# Altium PCB TAUV-Thruster_Board.PcbDoc
Units mil, origin at the board's own origin, x right, y up, seen from the top; angles counter-clockwise.
Board outline 3914.83 x 2417.52 mil, 2 copper layers (Top Layer, Bottom Layer); 41 components, 19 nets, 146 pads, 38 vias.
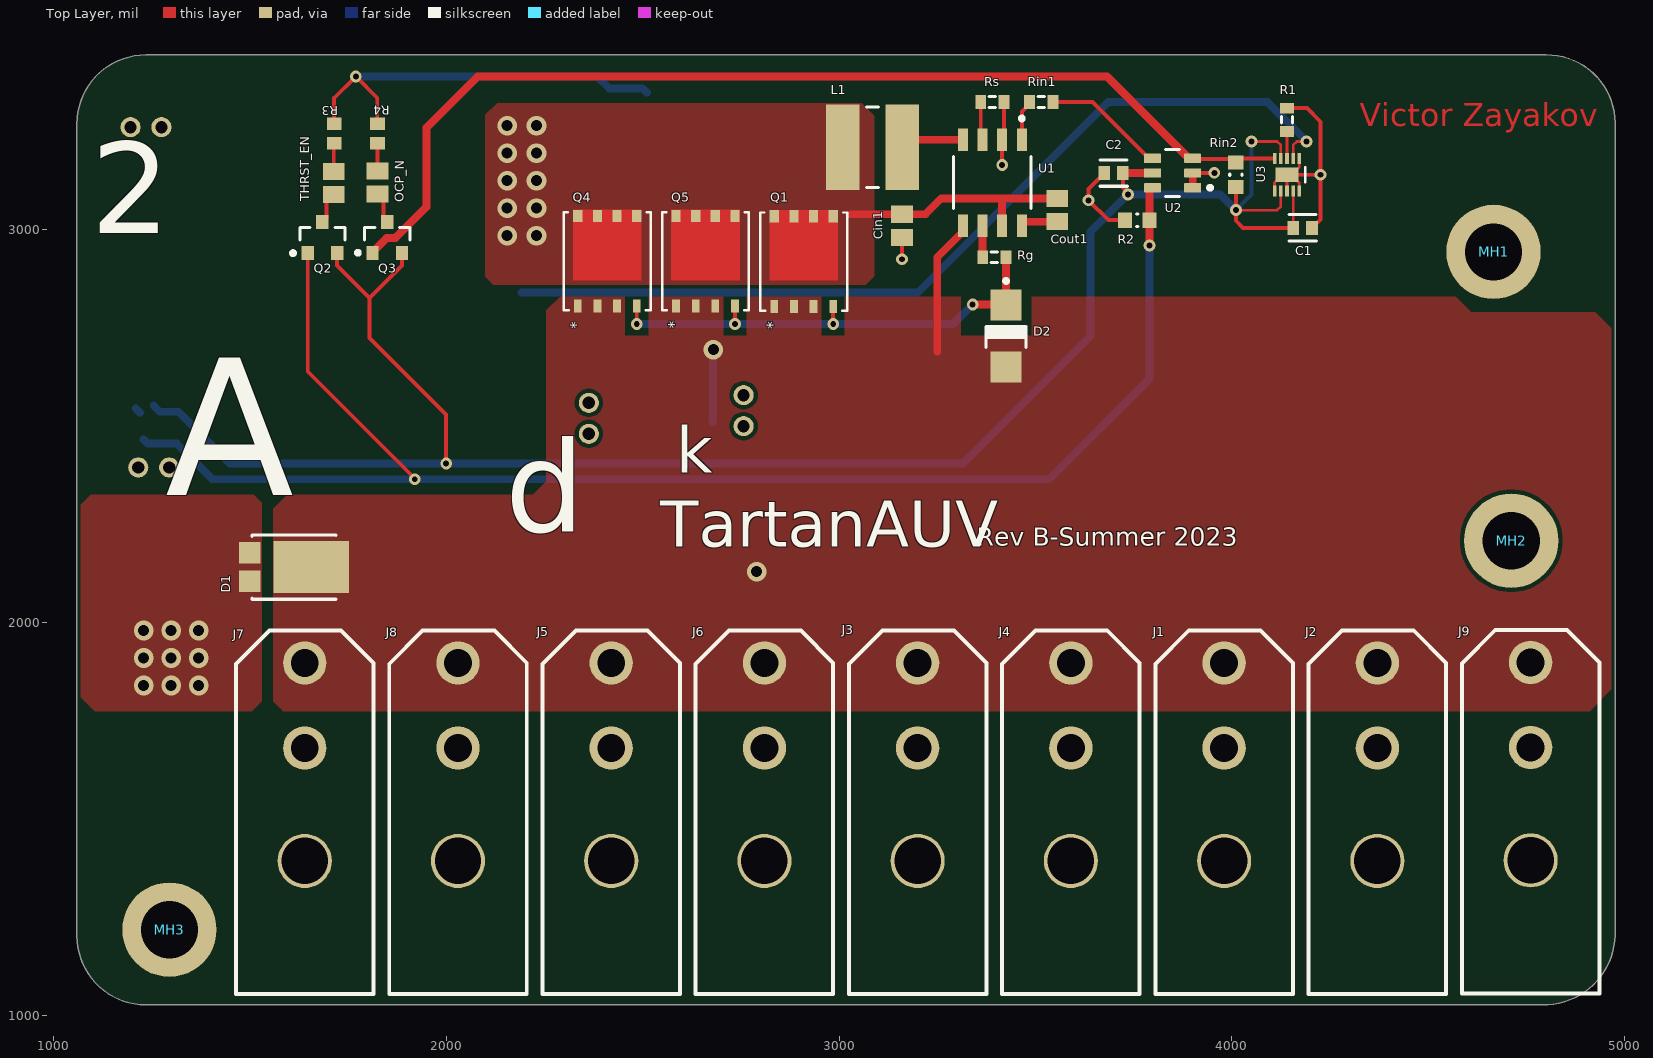
[diagram p0: Top Layer view]
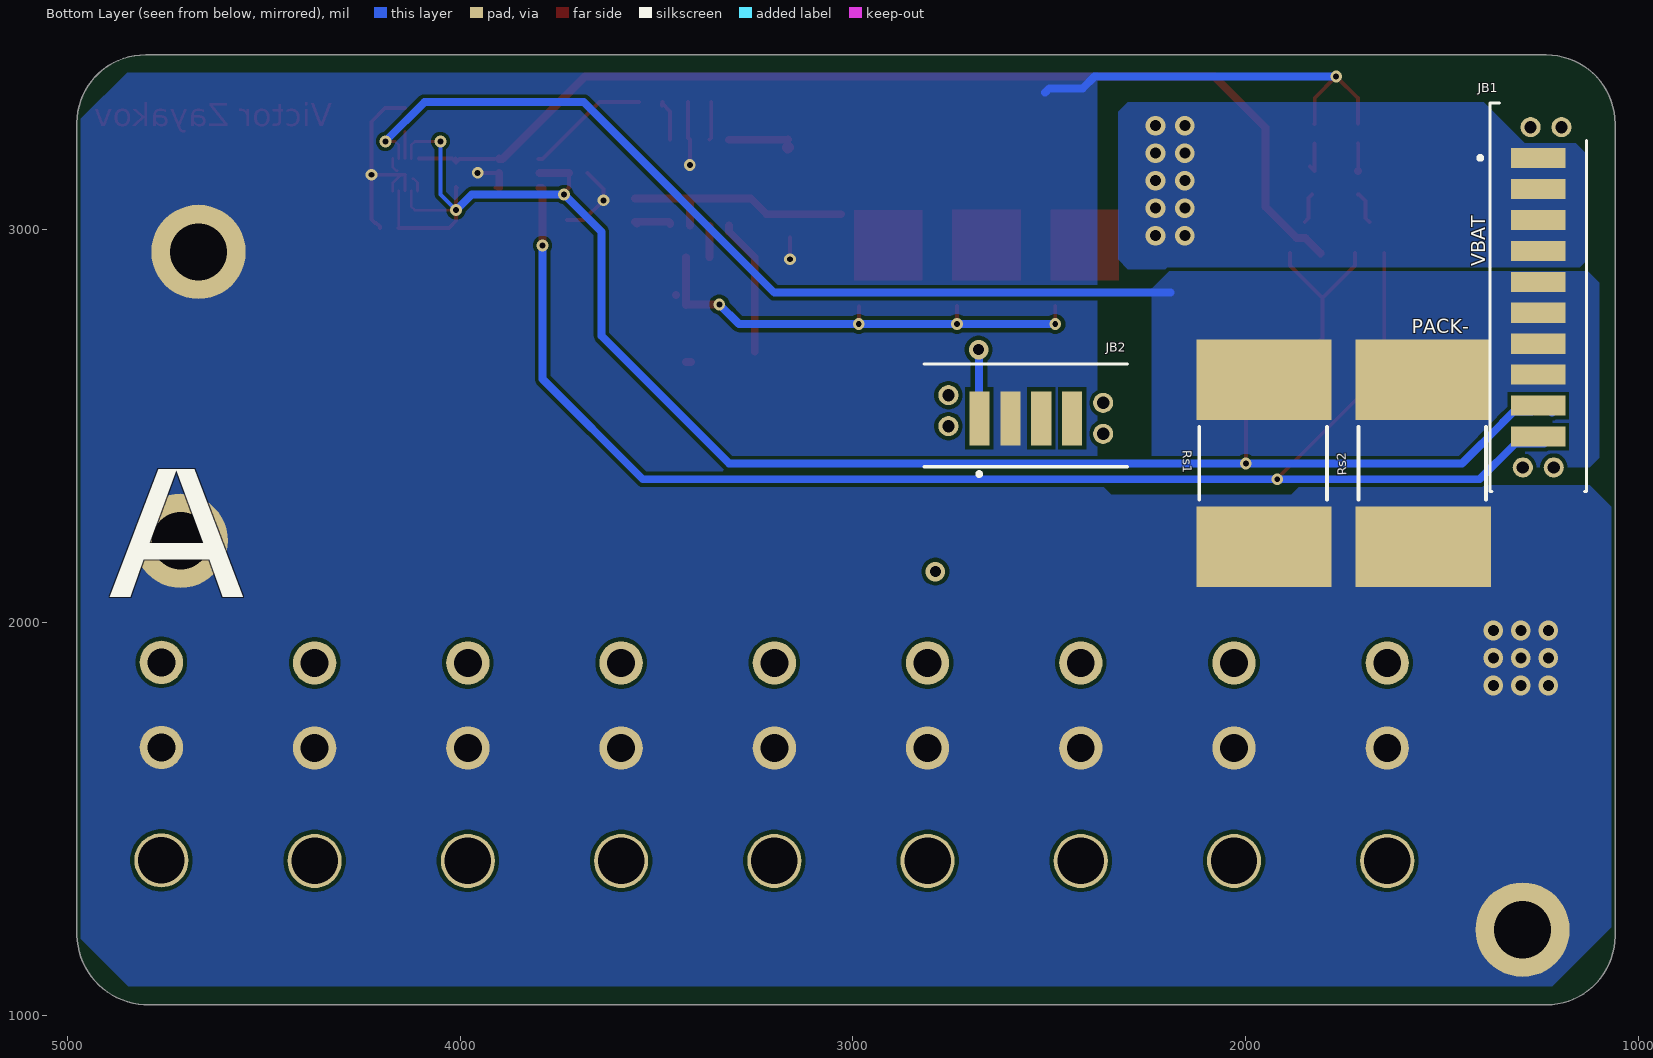
[diagram p1: Bottom Layer view, seen from below]
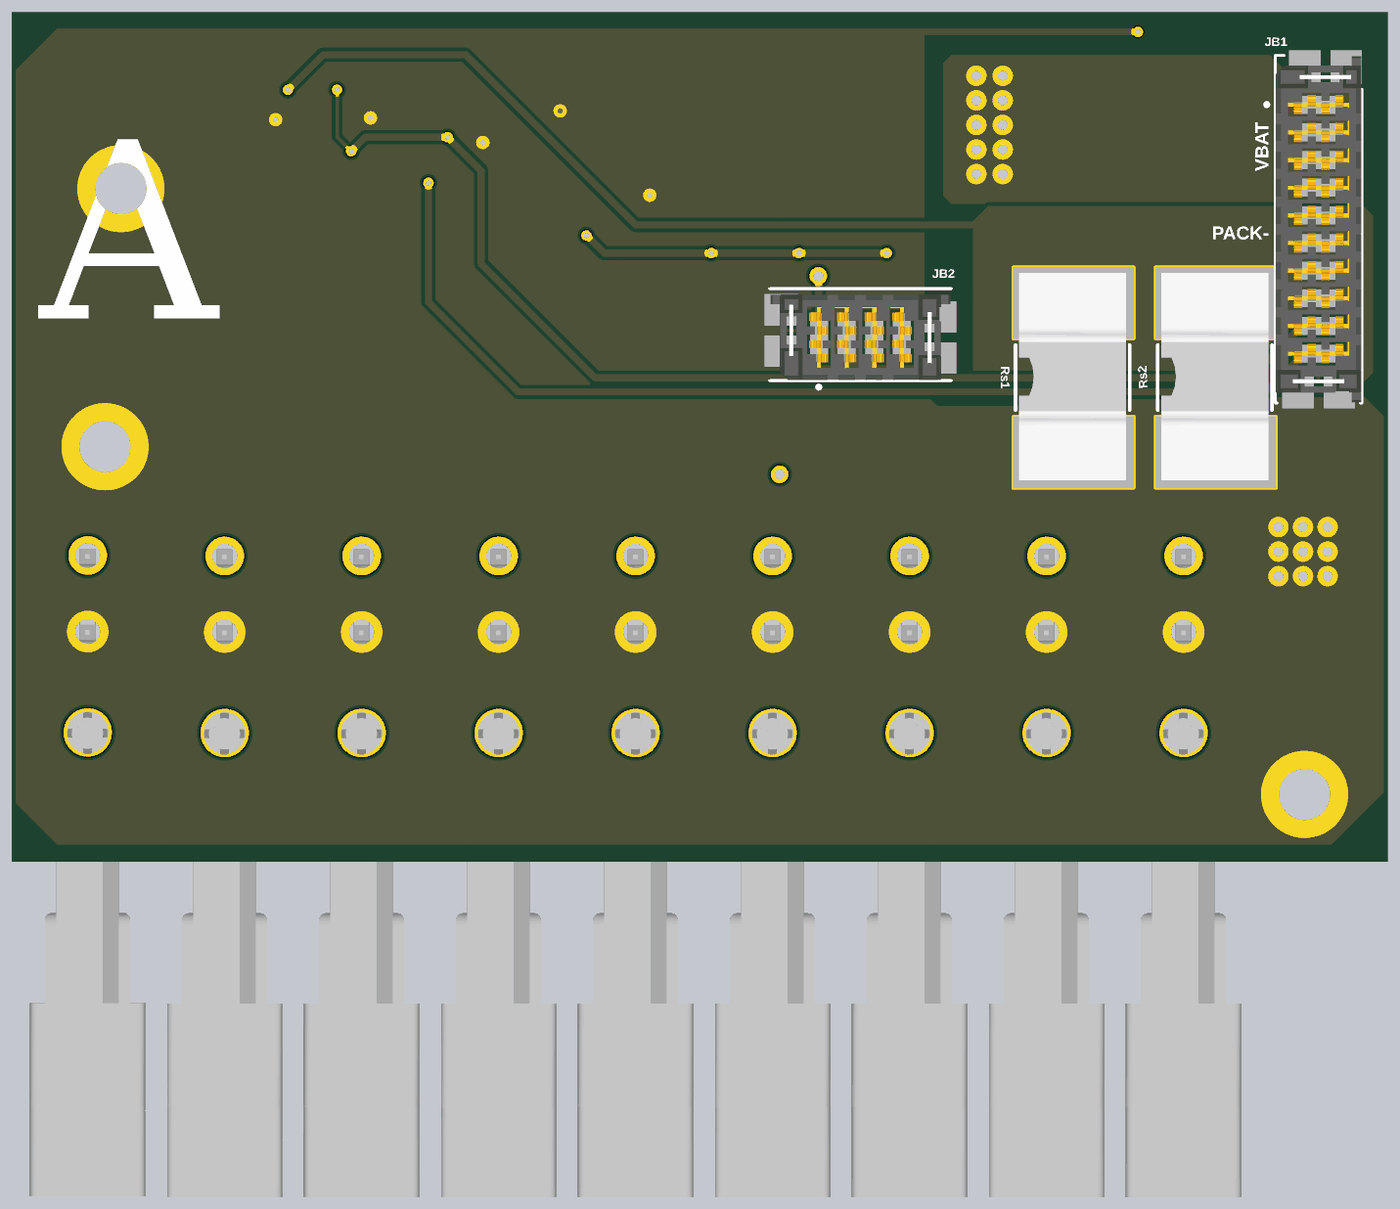
[diagram p2: 3D render of the assembled board from below, using the file's embedded part models]

## Layer stack, top to bottom
Top Solder: solder mask 0.4, Solder Resist, Dk 3.5
Top Layer: signal copper 2.7559
Dielectric 1: dielectric 12.6, FR-4, Dk 4.8
Bottom Layer: signal copper 2.7559
Bottom Solder: solder mask 0.4, Solder Resist, Dk 3.5

## Board outline
1060.17,1202.52 ccw(c1235.17,1202.52) 1235.17,1027.52 1235.17,1027.5 4790.12,1027.5 ccw(c4793.81,1208.69) 4975,1205 4975,3272.21 ccw(c4801.11,3271.11) 4800,3445 1235.17,3445 1235.17,3445.02 ccw(c1235.17,3270.02) 1060.17,3270.02

## Design rules (kind name [scope] priority, off if disabled: settings)
Clearance Clearance_1 [WithinRoom('Increased clearance')] p1: gap=20 ignorepadtopadclearanceinfootprint=FALSE except(0: Arc-Hole Track-Hole SMDPad-Hole THPad-Hole Via-Hole Fill-Hole Poly-Hole Region-Hole Text-Hole; 10: Text-Text)
Clearance [All] p2: gap=10 ignorepadtopadclearanceinfootprint=FALSE except(0: Arc-Hole Track-Hole SMDPad-Hole THPad-Hole Via-Hole Fill-Hole Poly-Hole Region-Hole Text-Hole; 6: SMDPad-SMDPad; 7: Arc-Arc Arc-Track Arc-SMDPad Arc-THPad Arc-Via Track-Track Track-SMDPad Track-THPad Track-Via SMDPad-THPad SMDPad-Via THPad-THPad THPad-Via Via-Via)
HoleSize [All] p1: absolutevalues=TRUE maxlimit=200 minlimit=12 maxpercent=80.000 minpercent=20.000
PlaneConnect [All] p1: planeconnectstyle=Direct reliefexpansion=20 reliefentries=4 reliefconductorwidth=10 reliefairgap=10
PolygonConnect [All] p1: connectstyle=Direct reliefconductorwidth=10 reliefentries=4 polygonreliefangle="90 Angle" airgapwidth=10
RoutingVias [All] p1: holewidth=28 width=50 viastyle="Through Hole" minholewidth=28 minwidth=50 maxholewidth=28 maxwidth=50
SolderMaskExpansion [All] p1: expansion=4 istentingtop=FALSE
Width [All] p1: maxlimit=50 minlimit=6 preferedwidth=10
28 further rules are at their usual default settings.

## Classes and differential pairs
component class U_Power: C1 Cin1 Cout1 D1 D2 L1 Q1 Q4 Q5 R1 Rg Rin1 Rin2 Rs U1 U3
component class U_Interfaces: C2 J1 J2 J3 J4 J5 J6 J7 J8 J9 JB1 JB2 MH1 MH2 MH3 OCP_N Q2 Q3 R2 R3 R4 Rs1 Rs2 THRST_EN U2

## Components (designator, comment, footprint, x,y, rotation, side; value= is the part's Value field where it differs from the comment)
C1 "0.1uF" FP-C0603C-CF-MFG 4180,3005 r180 top value="0.10 μF"
C2 "0.1uF" FP-C0603C-CF-MFG 3698.78,3144.37 r0 top value="0.10 μF"
Cin1 "X7R" C0805 3160,3010 r90 top value=1uF
Cout1 "X7R" C0805 3555,3050 r90 top value=1uF
D1 "SBRT15U50SP5-13" FP-PowerDI5-MFG 1612.68,2141.22 r0 top
D2 "1SMA5931BT3G" ONSC-SMA-2-403D-02_F_V 3425,2730 r270 top
J1 "" "2-PIN MEGAFIT RA" 3980,1055 r0 top
J2 "" "2-PIN MEGAFIT RA" 4370,1055 r0 top
J3 "" "2-PIN MEGAFIT RA" 3200,1055 r0 top
J4 "" "2-PIN MEGAFIT RA" 3590,1055 r0 top
J5 "" "2-PIN MEGAFIT RA" 2420,1055 r0 top
J6 "" "2-PIN MEGAFIT RA" 2810,1055 r0 top
J7 "" "2-PIN MEGAFIT RA" 1640,1055 r0 top
J8 "" "2-PIN MEGAFIT RA" 2030,1055 r0 top
J9 "" "2-pin Megafit RA" 4760,1056.42 r0 top
JB1 "UMPS-10-05.5-L-V-S-W-TR" FP-UMPS-10-05_5-L-V-S-W-T-MFG 1255.63,2828.07 r270 bottom
JB2 "UMPS-04-03.5-L-V-S-W-TR" FP-UMPS-04-03_5-L-V-S-W-T-MFG 2560,2520 r180 bottom
L1 "74477420" WE-PD2-M 3085,3210 r180 top
MH1 "#4-40" "MOUNTING HOLE #4-40" 4665.63,2943.66 r0 top
MH2 "#4-40" "MOUNTING HOLE #4-40" 4710.63,2208.66 r0 top
MH3 "#4-40" "MOUNTING HOLE #4-40" 1295.63,1218.66 r0 top
OCP_N "LED RED" C0805 1825,3120 r270 top (schematic designator D4)
Q1 "BSC0702LSATMA1" PG-TDSON-8-7 2910,2919.15 r90 top
Q2 "NVTR01P02LT1G" ONSC-SOT-23-3-318-08_V 1685,2980 r90 top
Q3 "NVTR01P02LT1G" ONSC-SOT-23-3-318-08_V 1850,2980.63 r90 top
Q4 "BSC0702LSATMA1" PG-TDSON-8-7 2410,2919.86 r90 top
Q5 "BSC0702LSATMA1" PG-TDSON-8-7 2660,2920 r90 top
R1 "0.1W 1%" J1-0603 4140,3280 r90 top value=2K
R2 "10K" RESC0603(1608)_N 3758.78,3024.37 r180 top value="10000.00 Ohm"
R3 "100R" RESC1609X50X30NL10T20 1715,3245 r90 top
R4 "100R" RESC1609X50X30NL10T20 1825,3245 r90 top
Rg "0603" J1-0603 3395,2930 r0 top value=100R
Rin1 "0603" J1-0603 3514.53,3325 r0 top value=10k
Rin2 "10K" RESC0603(1608)_N 4010,3140 r270 top value="10000.00 Ohm"
Rs "0603" J1-0603 3390,3325 r180 top value=10R
Rs1 "WSLP59312 2mR 8W" WSLP59312L000FEA 1953.52,2618.23 r270 bottom
Rs2 "WSLP59312 2mR 8W" WSLP59312L000FEA 1548.52,2618.23 r270 bottom
THRST_EN "LED RED" C0805 1713.78,3119.37 r270 top (schematic designator D3)
U1 "AUIR3241STR" FP-PG-DSO-8-MFG 3390,3120 r270 top
U2 "SN74LVC1G97DBVR" FP-DBV0006A-MFG 3848.78,3144.37 r180 top
U3 "Part Number: INA300AIDSQT" DSQ10_P9X1P5 4140,3140 r270 top value=Value

## Footprints (in the part's own frame and the unit in brackets; to place one, negate y for a bottom-side part, rotate by r counter-clockwise, add the part's x,y. Pads: shape width x height; smd on the part's side, far side on the other; paste and mask are expansions set on the pad)
"2-PIN MEGAFIT RA" [mm]
  round 2.8 hole 1.8: 1(0,15.9) 2(0,21.4)
  round 3.5 hole 3: ""(0,8.6)
  silkscreen extent -4.44,0 4.44,23.49, body extent -4.16,-24.98 4.19,21.9, height 16.75
"2-pin Megafit RA" [mm]
  round 2.8 hole 1.8: 1(0,15.9) 2(0,21.4)
  round 3.5 hole 3: ""(0,8.6)
  silkscreen extent -4.44,0 4.44,23.49, body extent -4.16,-24.98 4.19,21.9, height 16.75
C0805 [mm] "Chip Capacitor, Body 2.0x1.3mm, IPC High Density"
  rect 1.1x1.4 smd: 1(-0.75,0) 2(0.75,0)
  body extent -1.1,-0.72 1.1,0.72, height 1.4
DSQ10_P9X1P5 [mm]
  rect 0.7x0.23 smd paste-0.115 mask+0: 1(-1.05,0.8) 2(-1.05,0.4) 3(-1.05,0) 4(-1.05,-0.4) 5(-1.05,-0.8) 6(1.05,-0.8) 7(1.05,-0.4) 8(1.05,0) 9(1.05,0.4) 10(1.05,0.8)
  rect 0.914x1.499 smd paste-0.737 mask-0.737: 11(0,0)
  silkscreen extent -0.5,1.18 0.5,1.18, body extent -1.05,-1.05 1.05,1.05, height 0.79
FP-C0603C-CF-MFG [mm]
  rect 0.75x0.9 smd paste+0 mask+0: 1(-0.6,0) 2(0.6,0)
  silkscreen extent -0.87,-0.85 0.88,0.85, body extent -1.2,-0.6 1.2,0.6, height 0.25
FP-DBV0006A-MFG [mm]
  rrect17% 1.1x0.6 smd paste+0 mask+0: 1(-1.3,0.95) 2(-1.3,0) 3(-1.3,-0.95) 4(1.3,-0.95) 5(1.3,0) 6(1.3,0.95)
  silkscreen extent -2.55,-1.53 0.45,1.53, body extent -1.95,-1.78 1.95,1.78, height 0.25
FP-PG-DSO-8-MFG [mm]
  rect 1.45x0.65 smd paste+0 mask+0: 1(-2.775,1.905) 2(-2.775,0.635) 3(-2.775,-0.635) 4(-2.775,-1.905) 5(2.775,-1.905) 6(2.775,-0.635) 7(2.775,0.635) 8(2.775,1.905)
  silkscreen extent -4.27,-2.5 1.68,2.5, body extent -3.6,-2.6 3.6,2.6, height 0.25
FP-PowerDI5-MFG [mm]
  rect 1.4x1.39 smd paste+0 mask+0: 1(-2.862,0.92) 3(-2.862,-0.92)
  rect 4.86x3.36 smd paste+0 mask+0: 2(1.12,0)
  silkscreen extent -2.73,-2.07 2.73,2.07, body extent -3.66,-2.12 3.65,2.12, height 0.25
FP-UMPS-04-03_5-L-V-S-W-T-MFG [mm]
  rect 1.3x3.5 smd paste+0 mask+0: 1(-3,0) 2(-1,0) 3(1,0) 4(3,0)
  round 1.3 hole 0.8 paste-1000 mask+0: 5(-5,1.5) 6(5,1) 7(-5,-0.5) 8(5,-1)
  silkscreen extent -6.57,-3.72 6.57,3.52, body extent -6.53,-3.1 6.53,3.1, height 4.2
FP-UMPS-10-05_5-L-V-S-W-T-MFG [mm]
  rect 1.3x3.5 smd paste+0 mask+0: 1(-9,0) 2(-7,0) 3(-5,0) 4(-3,0) 5(-1,0) 6(1,0) 7(3,0) 8(5,0) 9(7,0) 10(9,0)
  round 1.3 hole 0.8 paste-1000 mask+0: 11(-11,1.5) 12(11,1) 13(-11,-0.5) 14(11,-1)
  silkscreen extent -12.56,-3.88 12.56,3.13, body extent -12.52,-3.1 12.52,3.1, height 6.2
J1-0603 [mm] "Chip Resistor, Body 1.6x0.8mm, IPC High Density"
  rect 0.7x0.9 smd: 1(-0.75,0) 2(0.75,0)
  silkscreen extent -0.2,-0.35 0.2,0.35, body extent -0.85,-0.48 0.85,0.48, height 0.9
"MOUNTING HOLE #4-40" [mm] "Mounting Hole for ANSI #4-40 w/ Flat Washer, Loose Fit"
  round 6.1 hole 3.7: 0(0,0)
ONSC-SMA-2-403D-02_F_V [mm] "Molded, 2-Leads, Body 4.32x2.6mm"
  rect 2x2 smd: 1(-2,0) 2(2,0)
  silkscreen extent -3.67,-1.31 0.74,1.3, body extent -2.16,-1.3 2.16,1.3, height 2.2
ONSC-SOT-23-3-318-08_V [mm] "SOT23, 3-Leads, Body 2.92x1.3mm, Pitch 0.95mm"
  rect 0.9x0.8 smd: 1(-1,0.95) 2(-1,-0.95) 3(1,0)
  silkscreen extent -1.12,-1.46 0.65,2.02, body extent -0.65,-1.46 0.65,1.46, height 1.11
PG-TDSON-8-7 [mm]
  rect 0.85x0.5 smd mask+0: 1(-2.9,1.905) 2(-2.9,0.635) 3(-2.9,-0.635) 4(-2.9,-1.905)
  rect 0.8x0.6 smd mask+0: 5(2.925,-1.905) 6(2.925,-0.635) 7(2.925,0.635) 8(2.925,1.905)
  Top Layer region: -1.225,-2.205 -1.225,2.205 3.324,2.205 3.324,-2.205
  silkscreen extent -3.17,-2.81 3.17,2.81, body extent 0,0 0.25,0.25, height 0.25
RESC0603(1608)_N [mm] "Chip Resistor, Body 1.6x0.8mm, IPC Medium Density"
  rect 0.9x1 smd: 1(-0.8,0) 2(0.8,0)
  silkscreen extent -0.05,-0.4 0.05,0.4, body extent -0.85,-0.47 0.85,0.47, height 0.6
RESC1609X50X30NL10T20 [mm] "Chip Resistor, 2-Leads, Body 1.55x0.85mm, IPC Medium Density"
  rect 0.8x0.95 smd: 1(-0.625,0) 2(0.625,0)
  body extent -0.82,-0.48 0.82,0.48, height 0.5
WE-PD2-M [mm] "SMD Inductor, 2-Leads, Body 5.8 x 5.2 mm"
  rect 2.15x5.5 smd: 1(-1.925,0) 2(1.925,0)
  silkscreen extent -0.38,-2.6 0.38,2.6, body extent -2.89,-2.6 2.89,2.6, height 4.49
WSLP59312L000FEA [mm] "0.002R 8W Shunt"
  rect 5.2x8.75 smd: 1(0,0) 2(10.8,0)
  silkscreen extent 3.05,-4.19 7.75,4.06, body extent -2.17,-3.94 12.83,3.81, height 0.89

## Part data
C1 C2: library part CMP-1035-02580-3, "CAP CER 0.1UF 10V X7R 0603", Capacitance="0.10 μF", Manufacturer=KEMET, Manufacturer Part Number=C0603C104K8RACTU, Package=C0603C-CF, Temperature="-55°C to +125°C", Temperature Characteristic=X7R, Temperature Coefficient=30ppm/°C, Temperature Range High=+125°C, Temperature Range Low=-55°C, Tolerance=0.1, Voltage Rating="10 V", Automotive=Yes, Automotive Grade="Grade 1", Category=Cap, ComponentLink2Description=Datasheet, ComponentLink2URL=https://api.kemet.com/component-edge/download/datasheet/C0603C100J5GACAUTO.pdf, Device Class L1="Passive Components", Device Class L2=Capacitors, Device Class L3="Ceramic Capacitors", Digikey Description="CAP CER 0.1UF 10V X7R 0603", Height=0.87mm, Lead Free=Yes, Material=Ceramic, Mouser Description="Multilayer Ceramic Capacitors MLCC - SMD/SMT 10volts 0.1uF X7R 10%", Octopart=https://octopart.com/c0603c104k8ractu-kemet-145075, RoHS=TRUE
Cin1 Cout1: library part Cap, "Capacitor", LatestRevisionDate=17-Jul-2002, LatestRevisionNote="Re-released for DXP Platform.", PackageDescription="Radial Cap, Thru-Hole; 2 Leads; 0.3 in Pin Spacing", PackageReference=RAD-0.3, Published=8-Jun-2000, Publisher="Altium Limited"
D1: library part CMP-12791-000016-1, "50V 15A Rectifier Schottky Diode", Forward Current=3A, Manufacturer="Diodes Inc.", Manufacturer Part Number=PDS3200-13, Max Junction Temp=+150°C, Max Repetitive Reverse Voltage=200V, Max Surge Forward Current=180A, Package=PowerDI5, Peak Reverse Current=1uA, Temperature="-65°C to +150°C", Temperature Range Low=-65°C, Automotive=No, Category=Diode, ComponentLink2Description=Datasheet, ComponentLink2URL=https://www.diodes.com/assets/Datasheets/ds30470.pdf, Device Class L1="Discrete Semiconductors", Device Class L2=Diodes, Device Class L3="Rectifier Diodes", Digikey Description="DIODE SCHOTTKY 200V 3A POWERDI5", Footprint Url=https://www.diodes.com/assets/Package-Files/PowerDI5.pdf, Height=1.15mm, Lead Free=Yes, Mouser Description="PDS3200 Series 200 V 3 A High Voltage Schottky Barrier Rectifier - PowerDI-5", Octopart=https://octopart.com/pds3200-13-diodes+inc.-332544, Reverse Voltage=200V, RoHS=TRUE, Standoff Height=0mm, Temperature Range High=+150°C
D2: library part CMP-1060-00118-1, "1.5 W Zener Voltage Regulator, 2-Pin SMA, Pb-Free, Tape and Reel", Manufacturer="On Semiconductor", ComponentLink1Description="Manufacturer URL", ComponentLink1URL=http://www.onsemi.com/, ComponentLink2Description=Datasheet, ComponentLink2URL=http://www.onsemi.com/pub_link/Collateral/1SMA5913BT3-D.PDF, ComponentLink3Description="Package Specification", ComponentLink3URL=http://www.onsemi.com/pub_link/Collateral/1SMA5913BT3-D.PDF, DatasheetVersion="Rev. 8", Mounting Technology="Surface Mount", PackageDescription="2-Pin Small Molded Package, J-Bend Lead, Body 2.605 x 4.315 mm", PackageReference=SMA-2-403D-02_F, PackageVersion="Rev. F, 11/2008", Packing="Tape and Reel", PartNumber=1SMA5931BT3G, RoHS=Pb-Free, VZ Typ (V)=18
J1 J2 J3 J4 J5 J6 J7 J8 J9: library part "2-pin megafit"
JB1: library part CMP-02770-000036-1, "CONN MPOWER 2MM FMALE 10POS GOLD", System=Connector
JB2: library part CMP-02770-000027-1, "CONN MPOWER 2MM FMALE 4POS GOLD"
L1: library part CMP-0227-00441-1, "SMD Power Inductor WE-PD2, L = 100 µH", Inductance="100 ÂµH", ComponentLink1Description="Manufacturer Link", ComponentLink1URL=http://www.we-online.com, ComponentLink2Description=Datasheet, ComponentLink2URL=http://www.we-online.de/katalog/media/pdf/74477420.pdf, DatasheetVersion="ver 2, Jun-2005", PackageDescription="SMD Inductor, 2-Leads, Body 5.8 x 5.2 mm", PackageReference=WE-PD2-M, PackageVersion=2005
MH1 MH2 MH3: library part "Mounting Hole #4-40, Loose Fit", "Mounting Hole for ANSI #4-40 w/ Flat Washer, Loose Fit", Datasheet=http://blogs.mentor.com/tom-hausherr/blog/tag/pcb-mounting-holes/
OCP_N THRST_EN: library part LED0, "led /  LTST-C171KRKT", Color=Red, Current - Test=20mA, Lens Color=Colorless, Manufacturer="Lite-On Inc.", Manufacturer Part Number=LTST-C171KRKT, Millicandela Rating=54mcd, Package / Case="0805 (2012 Metric)", Supplier Part Number 1=160-1427-1-ND, Voltage - Forward (Vf) (Typ)=2V, Category=Optoelectronics, ComponentLink1Description=http://optoelectronics.liteon.com/upload/download/DS22-2000-109/LTST-C171KRKT.pdf, ComponentLink1URL=http://optoelectronics.liteon.com/upload/download/DS22-2000-109/LTST-C171KRKT.pdf, Features=-, Height (Max)=0.80mm, Lens Style/Size="Rectangle with Flat Top, 1.40mm x 1.25mm", Lens Transparency=Clear, Mounting Type="Surface Mount", Packaging="Cut Tape (CT)", Part Status=Active, Pricing 1="1=0.31, 10=0.225, 25=0.1656, 100=0.1183, 250=0.0804, 500=0.07096, 1000=0.05558 (USD)", RoHS="RoHS Compliant", Size / Dimension="2.00mm L x 1.25mm W", Stock 1=260544, Supplier 1=Digi-Key, Viewing Angle=130°, Wavelength - Dominant=631nm, Wavelength - Peak=639nm
Q1 Q4 Q5: "No Description Available", Mfr_Name=Infineon, RefDes=RefDes, Type=Type
Q2 Q3: library part CMP-1058-00752-1, "Power MOSFET, -20 V, -1.3 A, P-Channel, 3-Pin SOT-23, Pb-Free, Tape and Reel", Manufacturer="On Semiconductor", Package Type=SOT-23-3, Channel Polarity="P Channel", Ciss Typ (pF)=225, ComponentLink1Description="Manufacturer URL", ComponentLink1URL=http://www.onsemi.com/, ComponentLink2Description=Datasheet, ComponentLink2URL=http://www.onsemi.cn/pub_link/Collateral/NTR1P02LT1-D.PDF, ComponentLink3Description="Package Specification", ComponentLink3URL=http://www.onsemi.cn/pub_link/Collateral/318-08.PDF, Configuration=Single, Coss Typ (pF)=130, Crss Typ (pF)=55, DatasheetVersion="Rev. 13", ID Max (A)=1.3, Mounting Technology="Surface Mount", PackageDescription="3-Pin Small Outline Transistor, Body 2.92 x 1.3 mm, Pitch 0.95 mm", PackageReference=SOT-23-3-318-08, PackageVersion="Rev. AP, 11/2009", Packing="Tape and Reel", PartNumber=NVTR01P02LT1G, PD Max (W)=0.4, Qrr Typ (nC)=8.5, RoHS=Pb-Free, V(BR)DSS Min (V)=20, VGS Max (V)=12, VGS(th) Max (V)=1.25
R1: library part Res3, "2k 0.1W 1%", LatestRevisionDate=29-May-2009, LatestRevisionNote="IPC-7351 Footprint Added.", PackageDescription="Chip Resistor", PackageReference=J1-0603, Published=8-Jun-2000, Publisher="Altium Limited"
R2 Rin2: library part CMP-1012-00098-1, "10K 0.1W 5% 0603 (1608 Metric)  SMD", Case-EIA=0603, Case-Metric=1608, Power="0.1 W", Tolerance="5 %", Technology=SMT
R3 R4: library part CMP-1012-00050-2, "100R 0.1W 5%", Manufacturer="Vishay Dale", Part Number=CRCW0603100RJNTA
Rg Rin1 Rs: library part Res3, "Resistor", LatestRevisionDate=29-May-2009, LatestRevisionNote="IPC-7351 Footprint Added.", PackageDescription="Chip Resistor", PackageReference=J1-0603, Published=8-Jun-2000, Publisher="Altium Limited"
Rs1 Rs2: library part WSLP59312L000FEA
U1: library part CMP-32851-000034-1, "IC GATE DRVR HIGH-SIDE 8SO", Case/Package=SOIC, Max Operating Temperature=150°C, Min Operating Temperature=-40°C, Output Current=300mA, Halogen Free="Halogen Free", Lead Free="Lead Free", Mount="Surface Mount", Number of Drivers=1, Number of Pins=8, Packaging="Cut Tape", RoHS Compliant=Yes
U2: library part CMP-0859-00234-4, "IC CONFIG MULT-FUNC GATE SOT23-6", Ambient Temperature Range High=+125°C, Ambient Temperature Range Low=-40°C, Manufacturer="Texas Instruments", Max Junction Temp=+150°C, Max Supply Voltage=5.5V, Min Supply Voltage=1.65V, Nominal Supply Current=10uA, Package=DBV0006A, Temperature="-40°C to +125°C", Automotive=No, Category=IC, ComponentLink2Description=Datasheet, ComponentLink2URL=http://www.ti.com/lit/ds/symlink/sn74lvc1g97.pdf, Device Class L1="Integrated Circuits (ICs)", Device Class L2="Logic ICs", Device Class L3="Logic Gates", Digikey Description="IC CONFIG MULT-FUNC GATE SOT23-6", Height=1.45mm, Ipc Land Pattern Name=SOT95P280X145-6, Lead Free=Yes, Logic Function Desc=Dual, Manufacturer Part Number=SN74LVC1G97DBVR, Mouser Description="Logic Gates Cnfgrble Mult Function Gate", Number Of Circuits=1, Number Of Inputs=3, Number of Outputs=1, Octopart=https://octopart.com/sn74lvc1g97dbvr-texas+instruments-464842, Propagation Delay=6.1ns, RoHS=TRUE, Standoff Height=0mm, Temperature Range High=+125°C, Temperature Range Low=-40°C
U3: library part INA300AIDSQT, "No Description Available", Built_By=EMA_UL_Team, Copyright="Copyright (C) 2018 Accelerated Designs. All rights reserved", Manufacturer_Part_Number=INA300AIDSQT, RefDes=RefDes, Type=DEV, Vendor="Texas Instruments"

## Via types
v1: diameter 50, hole 28, Top Layer to Bottom Layer, 21 vias
v2: diameter 30, hole 15, Top Layer to Bottom Layer, 17 vias

## Nets (pads, with @x,y where several pads share a name; then routed paths per layer and width w, separated by ;. In a path a pad name is that pad's centre, name@x,y a point inside that pad or via, vN(x,y) a via of type N, cw(c..) or ccw(c..) an arc to the next point about the centre after c; other vN are vias at no path point)
GND: C1.1 C2.1 Cin1.1 D1.1 D1.3 J1.1 J2.1 J3.1 J4.1 J5.1 J6.1 J7.1 J8.1 J9.1 JB2.2 MH1.0 MH2.0 MH3.0 R1.2 R2.2 R3.2 R4.2 Rs1.2 Rs2.2 Rs.1 U1.2 U2.1 U2.2 U3.1 U3.6 U3.8 U3.10 U3.11 | length 2193.5
  Top Layer w7: U3.6 4108.5,3120 4118.5,3130 U3.11@4120,3130 ; U3.8 U3.11 ; U3.11@4150,3140 4171.5,3118.5 U3.10 ; U3.11@4160,3150 4161.5,3150 4171.5,3160 U3.1
  Top Layer w10: R3.2@1715,3270 1715,3335 v2(1770,3390) 1824.61,3335.39 1824.61,3270 R4.2 ; v2(3160,2925) Cin1.1 ; v2(3415,3165) U1.2 3419.53,3233.78 Rs.1 ; C2.1 3635,3104.21 v2(3635,3075) 3685.63,3024.37 R2.2 ; U2.1 U2.1@3909.8,3106.97 ; U2.2 3900.28,3144.68 3954.68,3144.68 v2(3955,3145) ; U3.11 4150,3140 v2(4225,3140) ; R1.2 4190.47,3309.53 4225,3275 v2(4225,3140) ; C1.1 4203.62,3007.95 4213.39,3017.72 4216.34,3017.72 4225,3026.38 v2(4225,3140)
  Top Layer w20: U2.1 U2.2
  Bottom Layer w20: v2(1770,3390) 2385,3390 2415,3360 2500,3360 2511.01,3348.99
  other v1: 1230,1840 1300,1840 1370,1840 1230,1910 1300,1910 1370,1910 1230,1980 1300,1980 1370,1980
NetCout1_1: Cout1.1 U1.8 | length 101
  Top Layer w20: U1.8@3465,3015 3465,3017.68 3467.8,3020.47 Cout1.1 Cout1.1@3549.9,3015.37
NetD3_1: R3.1 THRST_EN.1 | length 72.5
  Top Layer w10: THRST_EN.1 1713.78,3218.78 R3.1@1715,3220
  Top Layer w20: THRST_EN.1 THRST_EN.1@1714.39,3149.51
NetD3_2: Q2.3 THRST_EN.2 | length 84.9
  Top Layer w10: Q2.3 1695,3029.37 1695,3073.19 1711.81,3090 THRST_EN.2@1715,3090
NetD4_1: OCP_N.1 R4.1 | length 86.3
  Top Layer w10: R4.1@1825,3220 OCP_N.1 OCP_N.1@1836.22,3160.75
NetD4_2: OCP_N.2 Q3.3 | length 77.7
  Top Layer w10: OCP_N.2@1831.38,3090 1840,3081.38 1840,3030 Q3.3
NetL1_1: L1.1 U1.4 | length 151.4
  Top Layer w20: L1.1@3165,3230 3165.75,3229.25 U1.4
  Top Layer w30: L1.1@3165,3210 L1.1@3165.75,3209.25
NetR1_1: R1.1 U3.3 | length 68.7
  Top Layer w7: U3.3 R1.1@4140,3250
NetRg_1: Rg.1 U1.6 | length 80.2
  Top Layer w20: U1.6@3365,3010 3365.24,3009.76 3365.24,2930.24 Rg.1
NetRin1_1: Rin1.1 U1.1 | length 108
  Top Layer w10: U1.1 3465,3301.06 3485,3321.06 Rin1.1 ; Rin1.1@3485.47,3316.06 Rin1.1@3485.47,3320
NetRin1_2: Rin1.2 U2.4 | length 316
  Top Layer w10: Rin1.2 3644.53,3325 3789.53,3180 U2.4@3800,3180
NetRs_2: Rs.2 U1.3 | length 97.6
  Top Layer w10: Rs.2 3360.47,3233.78 U1.3
OCP_N: Q3.1 Rin2.1 U2.3 U3.5 | length 2685.6
  Top Layer w10: U2.3@3911.57,3180 4001.5,3180 Rin2.1 4019.84,3181.34 4103.98,3181.34 ; Rin2.1@4010,3180 Rin2.1@4011.34,3181.34
  Top Layer w20: Q3.1@1810,2940 1810,2940.63 1848.35,2978.98 1870.73,2978.98 1950,3058.25 1950,3260 2080,3390 3681.89,3390 3891.89,3180 3900,3180 3899.96,3180.04 U2.3
PACK-: JB1.5 JB1.6 JB1.7 JB1.8 Rs1.1 Rs2.1 U3.2 | length 2316
  Top Layer w7: U3.2 4155.75,3215.75 4165,3225 v2(4190,3225)
  Top Layer w20: v2@4188.09,3223.09 v2(4190,3225)
  Bottom Layer w20: 2191.55,2840 3200,2840 3685,3325 4090,3325 v2(4190,3225)
THRST_EN: JB1.10 Q2.1 R2.1 U2.6 | length 3890.2
  Top Layer w10: Q2.1 1647.6,2639.32 v2@1921.92,2365
  Top Layer w20: v2(3790,2960) 3790.14,2960.14 3790.14,3024.23 R2.1 3790.28,3105.16 3792.09,3106.97 U2.6
  Bottom Layer w20: JB1.10@1230,2466.3 1240.59,2455.71 1314.29,2455.71 1405,2365 3535,2365 3790,2620 v2(3790,2960)
  other v2: 1920,2365
THRUSTERS_GATE: D2.1 Q1.4 Q4.4 Q5.4 Rg.2 | length 1219.2
  Top Layer w10: v2(2485,2760) Q4.4 ; v2(2735,2760) Q5.4 ; v2(2985,2760) Q1.4
  Top Layer w20: v2(3340,2810) 3423.74,2810 D2.1@3424.53,2809.21 ; Rg.2 D2.1@3424.53,2809.21 ; D2.1 D2.1@3424.53,2809.21 ; D2.1@3449.53,2834.21 D2.1@3450,2833.74
  Bottom Layer w20: v2(2485,2760) v2(2735,2760) v2(2985,2760) 3290,2760 v2(3340,2810)
VBAT: Cin1.2 Cout1.2 JB1.1 JB1.2 JB1.3 JB1.4 L1.2 Q1.5 Q1.6 Q1.7 Q1.8 Q4.5 Q4.6 Q4.7 Q4.8 Q5.5 Q5.6 Q5.7 Q5.8 U1.7 | length 610.5
  Top Layer w20: 3030.47,3039.53 Cin1.2 3219.53,3039.53 3260,3080 3415,3080 ; U1.7 3415,3080 ; Cout1.2@3555,3080 3415,3080
  other v1: 2155,2985 2230,2985 2155,3055 2230,3055 2155,3125 2230,3125 2155,3195 2230,3195 2155,3265 2230,3265
VBAT_THRUSTERS: D1.2 D2.2 J1.2 J2.2 J3.2 J4.2 J5.2 J6.2 J7.2 J8.2 J9.2 JB2.1 Q1.1 Q1.2 Q1.3 Q4.1 Q4.2 Q4.3 Q5.1 Q5.2 Q5.3 U1.5 | length 537.3
  Top Layer w20: 3250,2690 3250,2930 3315,2995 U1.5 ; D2.2@3412.52,2663.74 D2.2@3425,2663.74
  Bottom Layer w20: JB2.1@2678.11,2510 JB2.1@2679.06,2510.94 ; JB2.1 2679.06,2520.94 2679.06,2694.06 v1(2680,2695)
  other v1: 2790,2130
VCC_3V3: C1.2 C2.2 JB1.9 Q2.2 Q3.2 Rin2.2 U2.5 U3.4 U3.7 U3.9 | length 5014.5
  Top Layer w7: v2(4010,3050) 4115,3050 4124.25,3059.25 U3.7 ; v2(4050,3225) 4115,3225 4124.25,3215.75 U3.4 ; C1.2@4155.75,3005.75 U3.9
  Top Layer w10: Q2.2 1722.4,2909.31 1805,2826.72 ; Q3.2 1887.4,2909.12 1805,2826.72 ; v2(2000,2405) 2000,2530 1805,2725 1805,2826.72 ; C2.2 3722.4,3108.01 3735,3095.41 v2(3735,3090) ; Rin2.2@4008.03,3106.97 Rin2.2@4008.25,3106.75 ; Rin2.2 v2(4010,3050) 4010,3023 4028,3005 C1.2
  Top Layer w20: C2.2 U2.5
  Bottom Layer w10: v2(4010,3050) 4050,3090 v2(4050,3225)
  Bottom Layer w20: JB1.9@1210,2545 JB1.9@1220.55,2534.45 ; JB1.9 1271.22,2536.89 1318.84,2536.89 1345,2510.73 1345,2510 1450,2405 v2(2000,2405) 3315,2405 3640,2730 3640,2995 v2(3735,3090) 3970,3090 v2(4010,3050)
pads on no net: J1. J2. J3. J4. J5. J6. J7. J8. J9. JB1.11 JB1.12 JB1.13 JB1.14 JB2.3 JB2.4 JB2.5 JB2.6 JB2.7 JB2.8

## Polygon pours and split planes (outlines as drawn)
GND on Bottom Layer "GND_L02_P018" (solid, pour order 18): 1822.5,1990 4965,1990 4965,3282.21 4847.21,3400 2377.5,3400 2377.5,2360 2342.5,2325 1827.5,2325 1822.5,2330
GND on Bottom Layer "GND_L02_P000" (solid, pour order 0): 4965,2027.5 2182.5,2027.5 1860,2350 1235,2350 1125,2350 1070,2295 1070,1225 1220,1075 4845,1075 4965,1195
PACK- on Bottom Layer "PACK-_L02_P001" (solid, pour order 1): 2240,2410 2225,2395 1125,2395 1100,2420 1100,2865 1130,2895 2195,2895 2240,2850
VBAT on Bottom Layer "VBAT_L02_P009" (solid, pour order 9): 1155,2900 1130,2925 1130,3190 1160,3220 1290,3220 1395,3325 2300,3325 2325,3300 2325,2925 2300,2900 2220,2900
VBAT_THRUSTERS on Top Layer "VBAT_THRUSTERS_L01_P031" (solid, pour order 31): 4965,2715 4565,2715 4565,2790 4925,2790 4965,2750
VBAT_THRUSTERS on Top Layer "VBAT_THRUSTERS_L01_P005" (solid, pour order 5): 1585,1775 1560,1800 1560,2290 1595,2325 2220,2325 2255,2360 2255,2700 2285,2730 4965,2730 4965,1830 4910,1775
VBAT_THRUSTERS on Top Layer "VBAT_THRUSTERS_L01_P027" (solid, pour order 27): 3490,2830 4570,2830 4655,2745 4655,2700 3490,2700
VBAT_THRUSTERS on Top Layer "VBAT_THRUSTERS_L01_P025" (solid, pour order 25): 3310,2830 3310,2715 3015,2715 3015,2830
VBAT_THRUSTERS on Top Layer "VBAT_THRUSTERS_L01_P024" (solid, pour order 24): 2955,2830 2955,2715 2765,2715 2765,2830
VBAT_THRUSTERS on Top Layer "VBAT_THRUSTERS_L01_P023" (solid, pour order 23): 2705,2830 2705,2715 2515,2715 2515,2830
VBAT_THRUSTERS on Top Layer "VBAT_THRUSTERS_L01_P022" (solid, pour order 22): 2255,2685 2255,2795 2290,2830 2455,2830 2455,2685
VBAT on Top Layer "VBAT_L01_P021" (solid, pour order 21): 2099.83,3292.2 2129.83,3322.2 3057.8,3322.2 3089.83,3290.17 3089.83,2882.18 3067.65,2860 2120,2860 2099.83,2880.17
GND on Top Layer "GND_L01_P006" (solid, pour order 6): 1530,1800 1505,1775 1105,1775 1070,1810 1070,2300 1095,2325 1510,2325 1530,2305 1530,2125

## Other copper
Top Layer:
  text "Victor Zayakov" at 4325,3244.45 h100

## Silkscreen, mask and mechanical layers (free items; w line width, h text height)
Top Overlay:
  text "2" at 1095,2915 h400
  text "k" at 2585,2345 h200
  text "A" at 1285,2210 h600
  text "Rev B-Summer 2023" at 3350,2180.93 h80
  text "d" at 2150,2155 h400
  text "TartanAUV" at 2545,2155 h200
Bottom Overlay:
  text "VBAT" at 1378.66,2907.1 h60 r270
  text "PACK-" at 1577.28,2725 h60
  text "A" at 4895,1875 h1000
Top Solder:
  text "Victor Zayakov" at 4325,3244.45 h100
Mechanical 7:
  the board outline again, w10

## Text inside footprints (layer, text, board x,y; h text height)
Q1: Top 3D Body "*" at 2855,2826.65 h50 r90; Top Overlay "*" at 2855,2746.65 h50 r90
Q4: Top 3D Body "*" at 2355,2827.36 h50 r90; Top Overlay "*" at 2355,2747.36 h50 r90
Q5: Top 3D Body "*" at 2605,2827.5 h50 r90; Top Overlay "*" at 2605,2747.5 h50 r90